# Altium PCB T90MProboj.PcbDoc
Units mil, origin at the board's own origin, x right, y up, seen from the top; angles counter-clockwise.
Board outline 5907 x 3150 mil, 2 copper layers (Top Layer, Bottom Layer); 48 components, 36 nets, 183 pads, 33 vias.
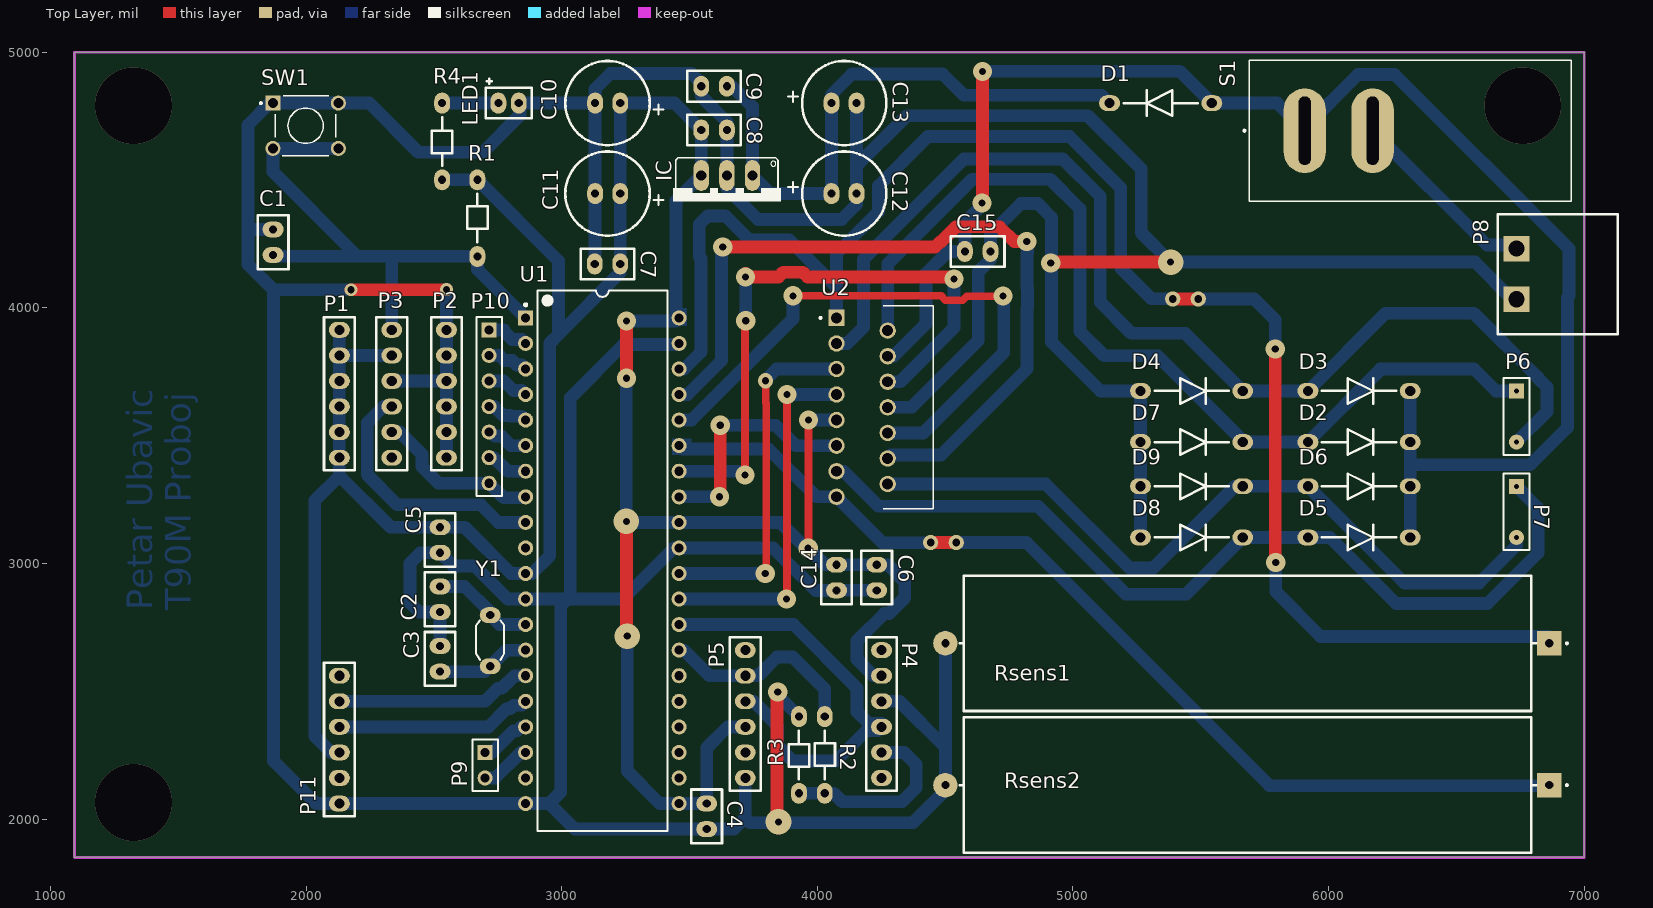
[diagram p0: Top Layer view]
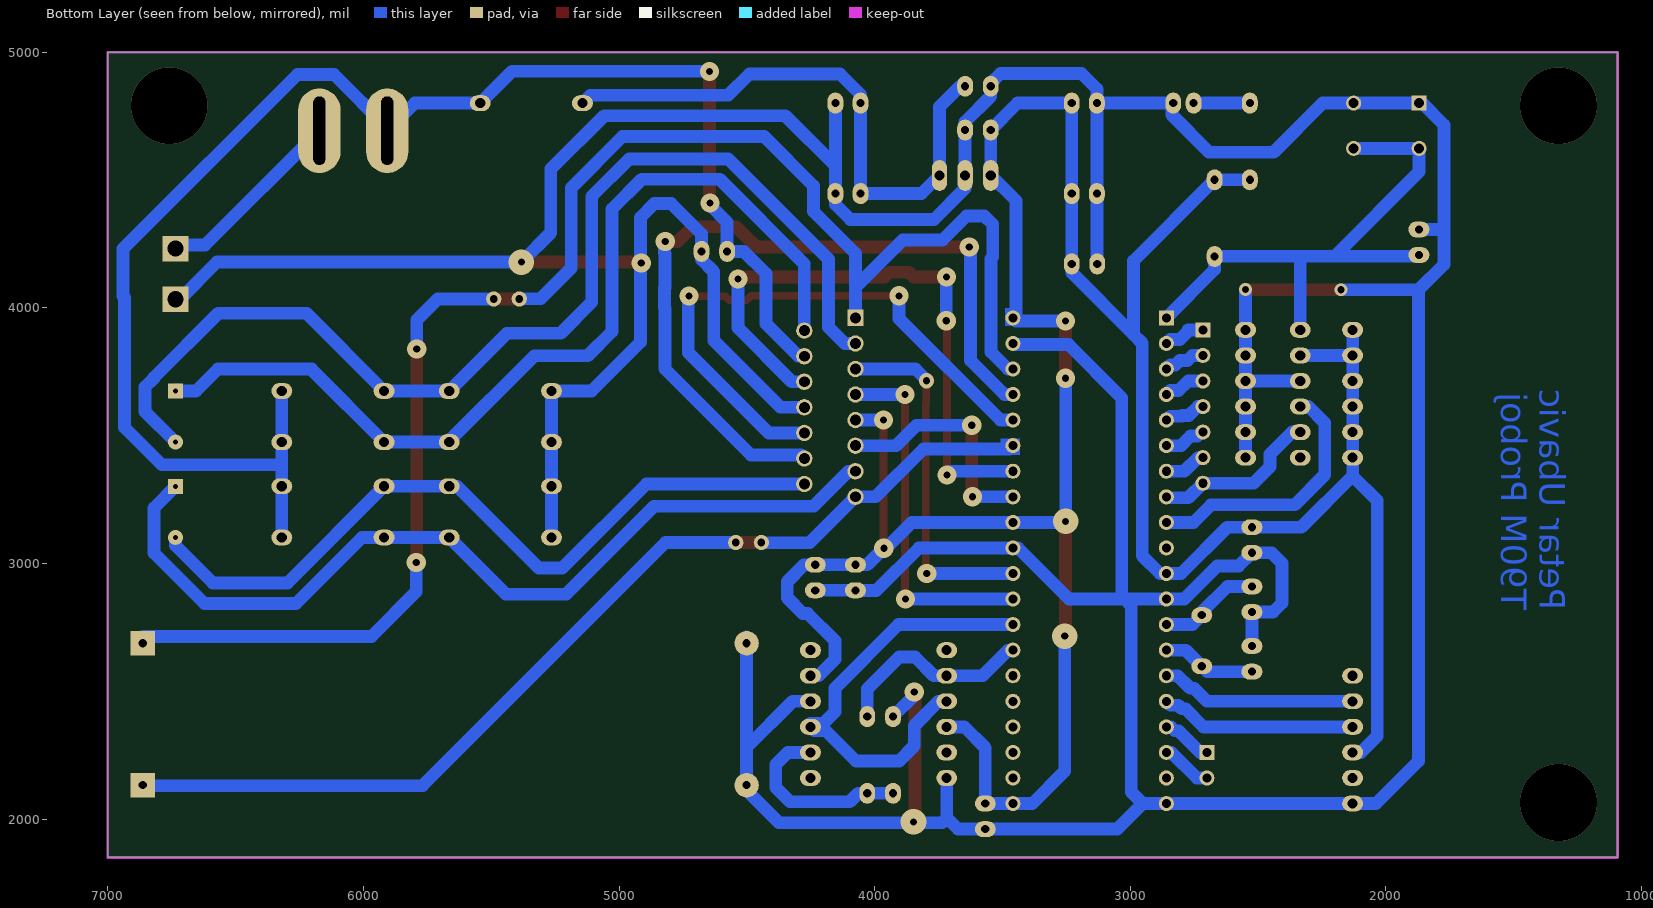
[diagram p1: Bottom Layer view, seen from below]

## Layer stack, top to bottom
Top Solder: solder mask 0.4, Solder Resist, Dk 3.5
Top Layer: signal copper 1.4
Dielectric 1: dielectric 12.6, FR-4, Dk 4.8
Bottom Layer: signal copper 1.4
Bottom Solder: solder mask 0.4, Solder Resist, Dk 3.5

## Board outline
1093,1850 7000,1850 7000,5000 1093,5000

## Design rules (kind name [scope] priority, off if disabled: settings)
Clearance Clearance_1 [InNet('No Net') And OnLayer('Top Layer') vs InNet('No Net') And OnLayer('Top Layer')] p1: gap=10 ignorepadtopadclearanceinfootprint=FALSE
Clearance [All] p2: gap=30 ignorepadtopadclearanceinfootprint=FALSE
PolygonConnect [All] p1: connectstyle=Relief reliefconductorwidth=10 reliefentries=4 polygonreliefangle="90 Angle" airgapwidth=10
RoutingVias [All] p1: holewidth=28 width=50 viastyle="Through Hole" minholewidth=28 minwidth=50 maxholewidth=28 maxwidth=50
SolderMaskExpansion [All] p1: expansion=4
Width [All] p1: maxlimit=50 minlimit=30 preferedwidth=43
30 further rules are at their usual default settings.

## Classes and differential pairs
component class Tenk: C1 C2 C3 C4 C5 C6 C7 C8 C9 C10 C11 C12 C13 C14 C15 D1 D2 D3 D4 D5 D6 D7 D8 D9 IC LED1 P1 P2 P3 P4 P5 P6 P7 P8 P9 P10 P11 R1 R2 R3 R4 S1 SW1 U1 Y1

## Components (designator, comment, footprint, x,y, rotation, side; value= is the part's Value field where it differs from the comment)
C1 "Cap" CAP100 1871,4257 r270 top value=100nF
C2 "Cap" CAP100 2524,2860 r90 top value=33pF
C3 "Cap" CAP100 2524,2627 r270 top value=33pF
C4 "Cap" CAP100 3567,2011 r90 top value=100nF
C5 "Cap" CAP100 2524,3092 r90 top value=100nF
C6 "Cap" CAP100 4232,2945 r90 top value=100nF
C7 "Cap" CAP100 3179,4172 r0 top value=100nF
C8 "Cap" CAP100 3596,4696 r180 top value=100nF
C9 "Cap" CAP100 3596,4867 r0 top value=100nF
C10 "Cap Pol1" RAD4 3229,4801 r180 top value=470uF
C11 "Cap Pol1" RAD4 3229,4447 r180 top value=470uF
C12 "Cap Pol1" RAD4 4055,4447 r0 top value=470uF
C13 "Cap Pol1" RAD4 4055,4801 r0 top value=470uF
C14 "Cap" CAP100 4075,2945 r90 top value=100nF
C15 "Cap" CAP100 4627,4221 r180 top value=100nF
D1 "Diode 1N4007" DIODE400 5353,4801 r0 top
D2 "Diode 1N5402" DIODE400 6109,3475 r180 top
D3 "Diode 1N5402" DIODE400 6109,3675 r180 top
D4 "Diode 1N5402" DIODE400 5454,3675 r180 top
D5 "Diode 1N5402" DIODE400 6109,3102 r180 top
D6 "Diode 1N5402" DIODE400 6109,3302 r180 top
D7 "Diode 1N5402" DIODE400 5454,3475 r180 top
D8 "Diode 1N5402" DIODE400 5454,3102 r180 top
D9 "Diode 1N5402" DIODE400 5454,3302 r180 top
IC "L7805" 78XXS 3646,4418 r180 top
LED1 "GREEN" LED_2 2792,4816 r0 top
P1 "5V" HEADER_6 2130,3664 r0 top
P2 "GND" HEADER_6 2549,3664 r0 top
P3 "Programator" HEADER_6 2334.95,3664 r0 top
P4 "Bluetooth" HEADER_6 4251,2411 r0 top
P5 "FT232" HEADER_6 3718,2411 r0 top
P6 "Motor 1" KLEMA 6735,3570 r270 top
P7 "Motor 2" KLEMA 6735,3197 r270 top
P8 "2EDGRC-5.08-02P-14-00A(H)" PWR_Con 6895,4149 r0 top
P9 "Interrupt" HDR1X2 2700,2261 r270 top
P10 "GPIO" HDR1X7 2716,3914 r270 top
P11 "FT232" HEADER_6 2130,2311 r0 top
R1 "Res1" RES400 2670,4351 r90 top value=10K
R2 "Res1" RES400 4029,2251 r90 top value=4.7K
R3 "Res1" RES400 3928,2251 r270 top value=10K
R4 "Res1" RES400 2532,4651 r270 top value=1K
Rsens1 "15W" Rsens 5681.9,2688 r180 top value=5
Rsens2 "15W" Rsens 5681.9,2133 r180 top value=5
S1 "" SW_RB141C1100 6320,4693 r180 top
SW1 "TASTER" SW_1825910-6-4 1997.95,4712.42 r0 top
U1 "DSPIC30F4013-20I/P" PDIP600-P40 3159,3011 r0 top
U2 "L298N" TO127P2020X500X2100-15 4075,3961 r0 top
Y1 "XTAL" OSC_5 2720,2713 r0 top

## Footprints (in the part's own frame and the unit in brackets; to place one, negate y for a bottom-side part, rotate by r counter-clockwise, add the part's x,y. Pads: shape width x height; smd on the part's side, far side on the other; paste and mask are expansions set on the pad)
78XXS [mil]
  oval 60x120 hole 40: GND(0,-100) IN(-100,-100) OUT(100,-100)
  silkscreen extent -210,-170 210,0
CAP100 [mil]
  oval 62x82 hole 32: 1(-50,0) 2(50,0)
  silkscreen extent -105,-60 105,60
DIODE400 [mil]
  oval 82x62 hole 40: 1(190,0) 2(-210,0)
  silkscreen extent -155,-50 135,50
HDR1X2 [mm] "Connector; Header; 2 Position"
  rect 1.5x1.5 hole 0.9: 1(0,0)
  round 1.5 hole 0.9: 2(2.54,0)
  silkscreen extent -1.27,-1.27 3.81,1.27
HDR1X7 [mm] "Connector; Header; 7 Position"
  rect 1.5x1.5 hole 0.9: 1(0,0)
  round 1.5 hole 0.9: 2(2.54,0) 3(5.08,0) 4(7.62,0) 5(10.16,0) 6(12.7,0) 7(15.24,0)
  silkscreen extent -1.27,-1.27 16.51,1.27
HEADER_6 [mil]
  oval 82x62 hole 39.37: 1(0,250) 2(0,150) 3(0,50) 4(0,-50) 5(0,-150) 6(0,-250)
  silkscreen extent -60,-300 60,300
KLEMA [mm] "Connector; Header; 2 Position"
  rect 1.5x1.5 hole 0.5: 1(-2.667,0)
  round 1.5 hole 0.5: 2(2.413,0)
  silkscreen extent -3.94,-1.27 3.68,1.27
LED_2 [mil]
  oval 62x82 hole 32: 1(40,-15) 2(-40,-15)
  silkscreen extent -90,-75 90,80, body extent -105,-126 110,106, height 346
OSC_5 [mil]
  oval 82x62 hole 32: 1(0,-115) 2(0,85)
  silkscreen extent -55,-90 55,65, body extent -92,-240 92,207, height 138
PDIP600-P40 [mm] "DIP, 40-Leads, Row Spacing 15.24mm, Pitch 2.54mm, Body 51.8x13.5mm"
  rect 1.5x1.5 hole 0.9: 1(-7.62,24.13)
  round 1.5 hole 0.9: 2(-7.62,21.59) 3(-7.62,19.05) 4(-7.62,16.51) 5(-7.62,13.97) 6(-7.62,11.43) 7(-7.62,8.89) 8(-7.62,6.35) 9(-7.62,3.81) 10(-7.62,1.27) 11(-7.62,-1.27) 12(-7.62,-3.81) 13(-7.62,-6.35) 14(-7.62,-8.89) 15(-7.62,-11.43) 16(-7.62,-13.97) 17(-7.62,-16.51) 18(-7.62,-19.05) 19(-7.62,-21.59) 20(-7.62,-24.13) 21(7.62,-24.13) 22(7.62,-21.59) 23(7.62,-19.05) 24(7.62,-16.51) 25(7.62,-13.97) 26(7.62,-11.43) 27(7.62,-8.89) 28(7.62,-6.35) 29(7.62,-3.81) 30(7.62,-1.27) 31(7.62,1.27) 32(7.62,3.81) 33(7.62,6.35) 34(7.62,8.89) 35(7.62,11.43) 36(7.62,13.97) 37(7.62,16.51) 38(7.62,19.05) 39(7.62,21.59) 40(7.62,24.13)
  silkscreen extent -7.74,-26.85 6.45,26.85, body extent -7.3,-26.85 7.3,26.85, height 6.35
PWR_Con [mil]
  rect 100x100 hole 62.99: 1(-160,-115) 2(-160,83)
  silkscreen extent -234,-253 236,217, body extent -239,-256 234,222, height 344
RAD4 [mil]
  oval 62x82 hole 32: 1(0,0) 2(98.43,0)
  silkscreen extent -170,-165 215,165
RES400 [mil]
  oval 82x62 hole 32: 1(-150,0) 2(150,0)
  silkscreen extent -95,-40 95,40
Rsens [mm]
  rect 2.43x2.43 / inner round 2.43 / far side rect 2.43x2.43 hole 0.8: 1(-30,0)
  round 2.43 hole 0.8: 2(30,0)
  silkscreen extent -31.85,-6.73 28.57,6.73
SW_1825910-6-4 [mm]
  rect 1.498x1.498 hole 0.99: 1(-3.25,2.25)
  round 1.498 hole 0.99: 2(3.25,2.25) 3(-3.25,-2.25) 4(3.25,-2.25)
  silkscreen extent -4.54,-3 3,3
SW_RB141C1100 [mm]
  oval 4.2x8.4 hole 1.2 slot 6.8 at 90 deg: 1(10.5,0) 2(3.757,0)
  silkscreen extent -16,-7 16.6,7, body extent -16.35,-7 16.35,7, height 24.57
TO127P2020X500X2100-15 [mm]
  rect 1.62x1.62 hole 1.08: 1(0,0)
  round 1.62 hole 1.08: 2(5.08,-1.27) 3(0,-2.54) 4(5.08,-3.81) 5(0,-5.08) 6(5.08,-6.35) 7(0,-7.62) 8(5.08,-8.89) 9(0,-10.16) 10(5.08,-11.43) 11(0,-12.7) 12(5.08,-13.97) 13(0,-15.24) 14(5.08,-16.51) 15(0,-17.78)
  silkscreen extent -1.69,-18.99 9.63,1.21

## Part data
C1 C2 C3 C4 C5 C6 C7 C8 C9 C14 C15: "Capacitor", LatestRevisionDate=17-Jul-2002, LatestRevisionNote="Re-released for DXP Platform.", PackageDescription="Radial Cap, Thru-Hole; 2 Leads; 0.3 in Pin Spacing", PackageReference=RAD-0.3, Published=8-Jun-2000, Publisher="Altium Limited"
C10 C11 C12 C13: "Polarized Capacitor (Radial)", LatestRevisionDate=17-Jul-2002, LatestRevisionNote="Re-released for DXP Platform.", PackageDescription="Polarized Capacitor (Radial); 2 Leads", PackageReference=RB7.6-15, Published=8-Jun-2000, Publisher="Altium Limited"
D1: "1 Amp General Purpose Rectifier", Code_JEDEC=DO-204-AL, ComponentLink1Description="Manufacturer Link", ComponentLink1URL=http://www.fairchildsemi.com/, ComponentLink2Description=Datasheet, ComponentLink2URL=http://www.fairchildsemi.com/ds/1N%2F1N4001.pdf, DatasheetVersion=1998, LatestRevisionDate=17-Jul-2002, LatestRevisionNote="Re-released for DXP Platform.", PackageDescription="Diode, Axial; Body 5.2 x 2.7 mm (LxDia. max), Lead Dia. 0.86 mm (max)", PackageReference=DO-41, PackageVersion=Aug-1999, Published=8-Jun-2000, Publisher="Altium Limited"
D2 D3 D4 D5 D6 D7 D8 D9: "3 Amp General Purpose Rectifier", ComponentLink1Description="Manufacturer Link", ComponentLink1URL=http://www.fairchildsemi.com/, ComponentLink2Description=Datasheet, ComponentLink2URL=http://www.fairchildsemi.com/ds/1N%2F1N5400.pdf, DatasheetVersion=1998, LatestRevisionDate=17-Jul-2002, LatestRevisionNote="Re-released for DXP Platform.", PackageDescription="Diode, Axial; Body 9.5 x 5.6 mm (LxDia. max), Lead Dia. 1.32 mm (max)", PackageReference=DO-201AD, PackageVersion=Aug-1999, Published=8-Jun-2000, Publisher="Altium Limited"
IC: "Linear Voltage Regulator IC 1 Output 1.5A D2PAK", Package="TO-263-3 Inchange Semiconductor", Availability=Unavailable, MF=STMicroelectronics, MP=L7805, Price=None, SnapEDA_Link=https://www.snapeda.com/parts/L7805/STMicroelectronics/view-part/563125/?ref=snap
LED1: library part LED1, "Typical RED GaAs LED", LatestRevisionDate=08-Jul-2005, LatestRevisionNote="Mech Layer 1 removed.", PackageDescription="LED; 2 Leads", PackageReference=LED-1, Published=8-Jun-2000, Publisher="Altium Limited"
P1 P2 P3 P4 P5 P11: library part "Header 6", "Header, 6-Pin", LatestRevisionDate=17-Jul-2002, LatestRevisionNote="Re-released for DXP Platform.", Publisher="Altium Limited"
P6 P7 P9: library part "Header 2", "Header, 2-Pin", LatestRevisionDate=17-Jul-2002, LatestRevisionNote="Re-released for DXP Platform.", Publisher="Altium Limited"
P8: library part 00000002, "TERM BLOCK HDR 2POS 90DEG 5.08MM", Manufacturer Part Number=2EDGRC-5.08-02P-14-00A(H), Price=0.1304, Suplier=TME, Suplier Product Link=https://www.tme.eu/en/details/2edgrc5.08-2p14/pluggable-terminal-blocks/degson-electronics/2edgrc-508-02p-14-00ah/
P10: library part "Header 7", "Header, 7-Pin", LatestRevisionDate=17-Jul-2002, LatestRevisionNote="Re-released for DXP Platform.", Publisher="Altium Limited"
R1 R2 R3 R4: "Resistor", LatestRevisionDate=17-Jul-2002, LatestRevisionNote="Re-released for DXP Platform.", PackageDescription="Axial Device, Thru-Hole; 2 Leads; 0.3 in Pin Spacing", PackageReference=AXIAL-0.3, Published=8-Jun-2000, Publisher="Altium Limited"
Rsens1 Rsens2: library part Res1, "Resistor", LatestRevisionDate=17-Jul-2002, LatestRevisionNote="Re-released for DXP Platform.", PackageDescription="Axial Device, Thru-Hole; 2 Leads;", Published=8-Jun-2000, Publisher="Altium Limited"
S1: library part RB141C1100, "Rocker Switches 15A 125VAC, OFF-ON, Black Rocker, No Markings", Package=None, Availability="In Stock", Check_prices=https://www.snapeda.com/parts/RB141C1100/ITC/view-part/?ref=eda, MF="e-switch inc", MP=RB141C1100, Price=None, Purchase-URL=https://pricing.snapeda.com/search/part/RB141C1100/?ref=eda, SnapEDA_Link=https://www.snapeda.com/parts/RB141C1100/ITC/view-part/?ref=snap
SW1: library part 1825910-6, "Switch Tactile OFF (ON) SPST Round Button PC Pins 0.05A 24VDC 100000Cycles 1.57N Thru-Hole Loose", Package=None, Availability=Unavailable, MP=1825910-6, Price=None
U1: "High-Performance 16-bit Digital Signal Controller, 48 KB Flash, 2 KB SRAM, 1 KB EEPROM, 40-Pin PDIP, Industrial Temperature", Supplier Part Number 1=DSPIC30F4013-20IP-ND, ComponentLink1Description=Datasheet, ComponentLink1URL=http://ww1.microchip.com/downloads/en/DeviceDoc/70138F.pdf, ComponentLink2Description="Packaging Specification", ComponentLink2URL=http://www.microchip.com/stellent/groups/techpub_sg/documents/packagingspec/en012702.pdf, ComponentLink3Description="Microchip.com Home", ComponentLink3URL=http://www.microchip.com/, DatasheetVersion="revF, Apr-2008", PackageDescription="40-Lead Plastic Dual In-Line (P) - 600 mil Body [PDIP]", PackageReference=PDIP600-P40, PackageVersion="revBB, Aug-2009", Published=29-Jan-2009, Publisher="Altium Limited", Supplier 1=Digi-Key, Supplier 2=Farnell, Supplier Part Number 2=1439755
U2: "Dual Full Bridge Motor Driver 15-Pin(15+Tab) MULTIWATT V Tube", Package=None, Availability=Unavailable, MP=L298N, Price=None
Y1: "Crystal Oscillator", LatestRevisionDate=17-Jul-2002, LatestRevisionNote="Re-released for DXP Platform.", PackageDescription="Crystal, Thru-Hole; 2 Leads; Body 3.1 x 8.2 mm (Dia.xH)", PackageReference=R38, Published=8-Jun-2000, Publisher="Altium Limited"

## Free pads (board coordinates)
  round 60 hole 30: 4(5390,4035) 5(5490,4035) 6(4443,3082) 7(4543,3082)

## Via types
v1: diameter 75, hole 28, Top Layer to Bottom Layer, 23 vias
v2: diameter 100, hole 28, Top Layer to Bottom Layer, 4 vias
v3: diameter 300, hole 300, Top Layer to Bottom Layer, 3 vias
v4: diameter 50, hole 28, Top Layer to Bottom Layer, 2 vias
v5: diameter 60, hole 28, Top Layer to Bottom Layer, 1 vias

## Nets (pads, with @x,y where several pads share a name; then routed paths per layer and width w, separated by ;. In a path a pad name is that pad's centre, name@x,y a point inside that pad or via, vN(x,y) a via of type N, cw(c..) or ccw(c..) an arc to the next point about the centre after c; other vN are vias at no path point)
+5: C4.2 C5.2 C6.2 C7.2 C8.2 C10.1 C11.1 C14.2 IC.OUT P1.1 P1.2 P1.3 P1.4 P1.5 P1.6 P3.2 P4.2 P5.4 P11.4 R1.2 R4.2 U1.11 U1.21 U1.32 U1.40 U2.9 | length 11919.1
  Top Layer w30: v1@3965,3061 v1(3965,3561)
  Top Layer w50: v2(3253,3165) 3253,2719 v2(3256,2716) ; v1(3253,3725) v1(3253,3949) ; v1(3964,3060) v1@3965,3061
  Bottom Layer w50: P11.4 2098.38,2261 2034,2325.38 2034,3246.86 2130,3342.86 ; P1.1 P1.2 ; P3.2 P1.2 ; R4.2 R1.2 2987,4184 2987,3896 ; v1(3253,3725) 3252,3724 3252,3166 v2(3253,3165) 3257,3161 U1.32 3855,3161 3956,3060 v1(3964,3060) 4029,2995 C14.2 C6.2 4276,2995 4342,2929 4342,2866 4281,2805 4262,2805 4155,2698 4155,2625.38 4219.38,2561 P4.2 ; v1(3253,3949) 3447,3949 U1.40 3447.5,3972.5 3447.5,4419.5 IC.OUT C8.2 3441,4801 C10.1 C11.1 C7.2 3229,4138 2987,3896 ; v2(3256,2716) 3256,2188 3383,2061 U1.21 C4.2 3567,2279 3649,2361 P5.4 ; v1@3966,3561 U2.9 ; 2130,3342.86 2330.86,3142 C5.2 2620.76,3142 2801.76,2961 U1.11 2884,2961 2953,3030 2953,3862 2987,3896 ; 2130,3342.86 P1.6 P1.5 P1.4 P1.3 P1.2
GND: C1.1 C2.1 C3.1 C4.1 C5.1 C6.1 C7.1 C8.1 C9.1 C10.2 C11.2 C12.2 C13.2 C14.1 C15.1 D4.1 D7.1 D8.1 D9.1 IC.GND LED1.1 P2.1 P2.2 P2.3 P2.4 P2.5 P2.6 P3.3 P4.3 P5.6 P8.1 P11.6 R3.1 Rsens1.2 Rsens2.2 SW1.1 SW1.2 U1.12 U1.20 U1.31 U1.39 U2.8 | length 23829.5
  Top Layer w50: v4(2176,4071) 2548,4071 v4(2549,4072) ; v1(3845,2498) 3842,2495 3842,1995 v2(3848,1989) ; v1(4913,4175) 4917,4179 v2(5382,4179) ; v2(3848,1989) 3860,1977 3848,1965 v2(3848,1989)
  Bottom Layer w50: C1.1 1774,4307 1773,4308 ; v4(2176,4071) 1872,4071 ; P3.3 P2.3 ; C3.1 C2.1 2442,2810 2406,2846 2406,3001 2447,3042 C5.1 2576,2990 2659.62,2990 2788.62,2861 U1.12 3023,2861 ; P2.6 P2.5 P2.4 P2.3 ; v4(2549,4072) P2.1 P2.2 P2.3 ; C7.1 3130.57,4173.57 C11.2 C10.2 ; U1.39 3454.5,3856.5 3241.5,3856.5 3033,3648 3033,2871 3023,2861 ; P5.6 3718,2005 ; v1(3845,2498) 3845,2484 R3.1 ; C13.2 4153.43,4556 ; C6.1 C14.1 4074,2894 3994,2894 3827,3061 U1.31 3439.46,3061 3239.46,2861 3023,2861 ; P4.3 4320,2461 4500.8,2280.2 ; U2.8 4368,3611 4629,3872 4629,4141.38 4677,4189.38 C15.1 4677,4289 4796,4408 4862,4408 4916,4354 4916,3867 5108,3675 D4.1 D7.1 D9.1 D8.1 ; Rsens1.2@4500.8,2713 Rsens1.2 4500.8,2280.2 ; P8.1 6717.97,4034 6572.97,4179 v2(5382,4179) 5267,4294 5267,4543 5058,4752 4349.43,4752 4153.43,4556 ; 1773,4308 1773,4715.95 1858.05,4801 SW1.1 SW1.2 2247,4801 2439,4609 2691.62,4609 2838,4755.38 2838,4801 C10.2 ; 1773,4308 1773,4170 1872,4071 ; 1872,4071 1872,2228 2039,2061 P11.6 U1.20 2951,2061 ; 2951,2061 2996,2106 2996,2834 3023,2861 ; 2951,2061 3051,1961 C4.1 3674,1961 3718,2005 ; C10.2 3130.57,4856.39 3191.19,4917 3508,4917 3546,4879 C9.1 3546,4827.62 3646,4727.62 C8.1 IC.GND 3646,4467.79 3767.79,4346 4095,4346 4153.43,4404.43 C12.2 4153.43,4556 ; 3718,2005 3737,1986 4374,1986 4501,2113 4501,2280 4500.8,2280.2
INT0: P9.1 U1.17 | length 200.4
  Bottom Layer w50: P9.1 2726.32,2261 2810.85,2345.53 2825.42,2345.53 2840.9,2361 U1.17
INT2: P9.2 U1.18 | length 200.4
  Bottom Layer w50: P9.2 2739.46,2161 2839.46,2261 U1.18
MCLR: C1.2 P3.1 R1.1 SW1.3 SW1.4 U1.1 | length 2222.2
  Bottom Layer w50: C1.2 1875.58,4202.42 2334.95,4202.42 ; SW1.4 SW1.3 1870,4532.42 2195.42,4207 ; P3.1 2334.95,4202.42 ; U1.1@2854.42,3956.42 U1.1 2670,4150 R1.1 2668.58,4202.42 2334.95,4202.42
NetC9_2: C9.2 C12.1 C13.1 D1.2 IC.IN | length 2296.4
  Bottom Layer w50: C9.2 3666,4867 3746,4787 IC.IN 3817,4447 C12.1 C13.1 4055,4834.2 4135.8,4915 4490,4915 4573,4832 5112,4832 D1.2
NetLED1_1: LED1.2 R4.1 | length 214
  Bottom Layer w50: R4.1 LED1.2@2746,4801
NetP4_5: P4.5 R2.1 R3.2 | length 741.3
  Bottom Layer w50: R3.2 R2.1 4064,2101 4097,2068 4331,2068 4387,2124 4387,2214 4340,2261 P4.5
NetP8_2: P8.2 S1.2 | length 753.9
  Bottom Layer w50: S1.2 6619.05,4246.05 6720.95,4246.05 P8.2
OSC1: C2.2 U1.13 Y1.2 | length 403.7
  Bottom Layer w50: C2.2 2620,2910 2720,2810 Y1.2 2757,2761 U1.13
OSC2: C3.2 U1.14 Y1.1 | length 369.8
  Bottom Layer w50: C3.2 2699,2577 Y1.1 2783,2661 U1.14
OUT1: D2.1 D7.2 P6.1 U2.2 | length 3729.7
  Bottom Layer w50: U2.2 4275,4172 4606,4503 4911,4503 5027,4387 5027,3908 5122,3813 5331,3813 5664,3480 D7.2 D2.1 6202,3758 6202,3761 6569,3761 6655,3675 P6.1 P6.1@6730.47,3679.53
OUT2: D3.1 D4.2 P6.2 U2.3 | length 4363.9
  Bottom Layer w50: U2.3 4116.56,3861 4180,3924.44 4180,4190.14 4572.86,4583 4960,4583 5107,4436 5107,4022 5228,3901 5438,3901 D4.2 D3.1 6223,3979 6567.84,3979 6819.53,3727.31 6819.53,3724.47 6854,3690 6854,3594 P6.2
OUT3: D5.1 D8.2 P7.1 U2.13 | length 3519.9
  Bottom Layer w50: U2.13 4102.12,3361 4239.01,3224.11 4862.89,3224.11 5207,2880 5442,2880 D8.2 D5.1 6005.86,3102 6263.86,2844 6622,2844 6819.53,3041.53 6819.53,3217.47 P7.1
OUT4: D6.1 D9.2 P7.2 U2.14 | length 2977.8
  Bottom Layer w50: U2.14 4893,3311 5222,2982 5314,2982 5634,3302 D9.2 D6.1 6297,2924 6588.86,2924 6735,3070.14 P7.2
PGC: P3.5 P10.7 U1.8 | length 661
  Bottom Layer w50: P3.5 2366.58,3514 2453,3427.58 2453,3378.38 2517.38,3314 P10.7 2773,3257 2855,3257 U1.8
PGD: P3.4 U1.9 | length 1022.4
  Bottom Layer w50: P3.4 2303.33,3614 2238.95,3549.62 2238.95,3347.05 2356.53,3229.47 2684.53,3229.47 2753,3161 U1.9
PWM1: U1.34 U2.6 | length 2460.4
  Top Layer w30: v1(3717,3346) 3717,3947 v1(3720,3950) ; v1@4527,4121 v1(4535,4113)
  Top Layer w50: v1(3719,4121) 3719,4134 3732,4121 3847.81,4121 3866.5,4139.69 3943.13,4139.69 3961.81,4121 v1@4527,4121
  Bottom Layer w50: U1.34 3700,3361 3715,3346 v1(3717,3346) ; v1(3719,4121) 3719,4134 3720,4135 v1(3720,3950) ; U2.6 4324,3711 4535,3922 v1(4535,4113)
PWM2: U1.33 U2.11 | length 927.4
  Top Layer w50: v1(3617,3261) 3620,3264 v1(3620,3541)
  Bottom Layer w50: U1.33 v1(3617,3261) ; v1(3620,3541) 3836,3541 3916,3461 U2.11
RB0: P10.1 U1.2 | length 168.1
  Bottom Layer w50: P10.1 2774.47,3914 2774.47,3908.69 2806.69,3876.47 2821.23,3876.47 2821.28,3876.42 2843.58,3876.42 U1.2
RB1: P10.2 U1.3 | length 165
  Bottom Layer w50: P10.2 2756.03,3814 2776.03,3794 2806.46,3794 2823.99,3776.47 2843.53,3776.47 U1.3
RB2: P10.3 U1.4 | length 165
  Bottom Layer w50: P10.3 2773.32,3714 2810.85,3676.47 2843.53,3676.47 U1.4
RB3: P10.4 U1.5 | length 165
  Bottom Layer w50: P10.4 2735.54,3614 2771.01,3578.53 2797.29,3578.53 2799.34,3576.47 2843.53,3576.47 U1.5
RB4: P10.5 U1.6 | length 165
  Bottom Layer w50: P10.5 2722.4,3514 2737.88,3498.53 2764.15,3498.53 2801.68,3461 U1.6
RB5: P10.6 U1.7 | length 165
  Bottom Layer w50: P10.6 2735.54,3414 2788.54,3361 U1.7
RB9: pad.4 pad.5 Rsens1.1 U1.38 U2.1 | length 6186.9
  Top Layer w50: pad.4 pad.5 ; v1(5791,3839) 5791,3006 v1(5793,3004)
  Bottom Layer w50: U1.38 3478.54,3761 3545,3827.46 3545,4192.19 3537.5,4199.69 3537.5,4326.5 3571,4360 3640.65,4360 3734.65,4266 3890,4266 4075,4081 ; U2.1 4075,4081 ; pad.4 5389,4036 5307,4036 5187,4156 5187,4469.14 4986.14,4670 4432,4670 4239.43,4477.43 4239.43,4377.29 4075,4212.86 4075,4081 ; pad.5 5707,4035 5708,4036 5791,3953 v1(5791,3839) ; v1(5793,3004) 5793,2890 5968,2715 6861,2715 Rsens1.1@6863,2713
RB10: U1.37 U2.12 | length 3125.4
  Top Layer w50: v1(3630,4238) 4460.38,4238 4481.38,4259 4482.38,4258 4541.38,4317 4712.62,4317 4770.62,4259 4771.62,4260 v1(4819,4260)
  Bottom Layer w50: U1.37 3491.68,3661 3625,3794.32 3625,4243 3630,4248 v1(3630,4238) ; U2.12 4288.11,3424.11 4483.11,3424.11 4820.5,3761.5 4820.5,3999.69 4821.5,4000.69 4821.5,4077.31 4820.5,4078.31 4820.5,4213.31 4821.5,4214.31 4821.5,4257.5 v1(4819,4260)
RB11: U1.36 U2.10 | length 2339.9
  Top Layer w30: v1(3904.81,4047.19) 4484.14,4047.19 4500.83,4030.5 4569.17,4030.5 4584.67,4046 v1(4726,4046)
  Bottom Layer w50: U1.36 3508.21,3561 3904.81,3957.61 v1(3904.81,4047.19) ; U2.10 4414,3511 4729,3826 4729,4043 v1(4726,4046)
RB12: pad.6 pad.7 Rsens2.1 U1.35 U2.15 | length 3956.6
  Top Layer w50: pad.6 pad.7
  Bottom Layer w50: U1.35 3471.5,3448.5 3808.5,3448.5 3996,3261 U2.15 4255,3081 4442,3081 pad.6 ; pad.7 4818,3082 5769,2131 6861,2131 Rsens2.1
RF0: U1.30 U2.5 | length 1393.1
  Top Layer w30: v5(3797,3715) 3799.5,3712.5 3799.5,3696.17 3798.5,3695.17 3798.5,3626.83 3799.5,3625.83 v1@3799.5,2964.5
  Top Layer w50: v1(3796,2961) v1@3799.5,2964.5
  Bottom Layer w50: U1.30 v1(3796,2961) ; v5(3797,3715) 3797,3718 3840,3761 U2.5
RF1: U1.29 U2.7 | length 1412.8
  Top Layer w30: v1@3881,2863 v1(3881,3661)
  Top Layer w50: v1(3879,2861) v1@3881,2863
  Bottom Layer w50: U1.29 v1(3879,2861) ; v1@3883,3661 U2.7
U1ARX: P11.3 U1.16 | length 770.4
  Bottom Layer w50: P11.3 2713.19,2361 2784.19,2432 2798.76,2432 2812.29,2445.53 2843.53,2445.53 U1.16
U1ATX: P11.2 U1.15 | length 770.4
  Bottom Layer w50: P11.2 2700.05,2461 2751.05,2512 2765.62,2512 2814.62,2561 U1.15
U2RX: P4.4 P5.3 U1.28 | length 1750.6
  Bottom Layer w50: U1.28 3906.24,2761 4155,2512.24 4155,2420 4200,2375 4251,2375 P4.4 4237,2347 4192.24,2347 4073.24,2228 3904,2228 3845,2287 3845,2365.62 3749.62,2461 P5.3
U2TX: P5.2 R2.2 U1.27 | length 801.4
  Bottom Layer w50: U1.27 3478.54,2661 3578.54,2561 P5.2 3769,2561 3842,2634 3903.86,2634 4029,2508.86 R2.2
VCC: C15.2 D1.1 D2.2 D3.2 D5.2 D6.2 S1.1 U2.4 | length 6037.9
  Top Layer w50: v1(4644,4410) 4644,4409 4646,4411 v1@4646,4915
  Bottom Layer w50: U2.4 4297.88,3811 4425,3938.12 4425,4134.14 4511.86,4221 C15.2 4577,4335 4644,4402 v1(4644,4410) ; v1@4646,4915 4657,4926 5418,4926 D1.1 5798.61,4801 S1.1 5906.61,4704.89 6115.07,4913.35 6257.65,4913.35 6940,4231 6940,4046.22 6934,4040.22 6934,3532.16 6787.84,3386 6787.31,3386.53 6320.47,3386.53 6319,3388 ; D5.2 D6.2 6319,3388 ; D3.2 D2.2 6319,3388
  other v1: 4646,4925
pads on no net: P3.6 P4.1 P4.6 P5.1 P5.5 P11.1 P11.5 U1.10 U1.19 U1.22 U1.23 U1.24 U1.25 U1.26
copper on no net:
  other v3: 1325,2065 1325,4791 6760,4791

## Keep-outs
Keep-Out Layer:
  lines w10: 1094,1850 1094,5000 7000,5000 7000,1850 1094,1850

## Other copper
Bottom Layer:
  rectangle net +5: 3424,3929 3490,3999
  rectangle net RB12: 3432,3424 3507,3490
  text "Petar Ubavic / T90M Proboj" at 1549,2817 h100 r90

## Text inside footprints (layer, text, board x,y; h text height)
IC: Mechanical 13 "-" at 3671.01,4568.08 h50.03 r180; Mechanical 13 "I" at 3771.16,4568.19 h50.06 r180; Mechanical 13 "O" at 3570.94,4568.12 h50.04 r180